# Altium PCB PCB1.PcbDoc
Units mil, origin at the board's own origin, x right, y up, seen from the top; angles counter-clockwise.
Board outline 1013.97 x 1387.98 mil, 2 copper layers (Top Layer, Bottom Layer); 17 components, 21 nets, 86 pads, 8 vias.
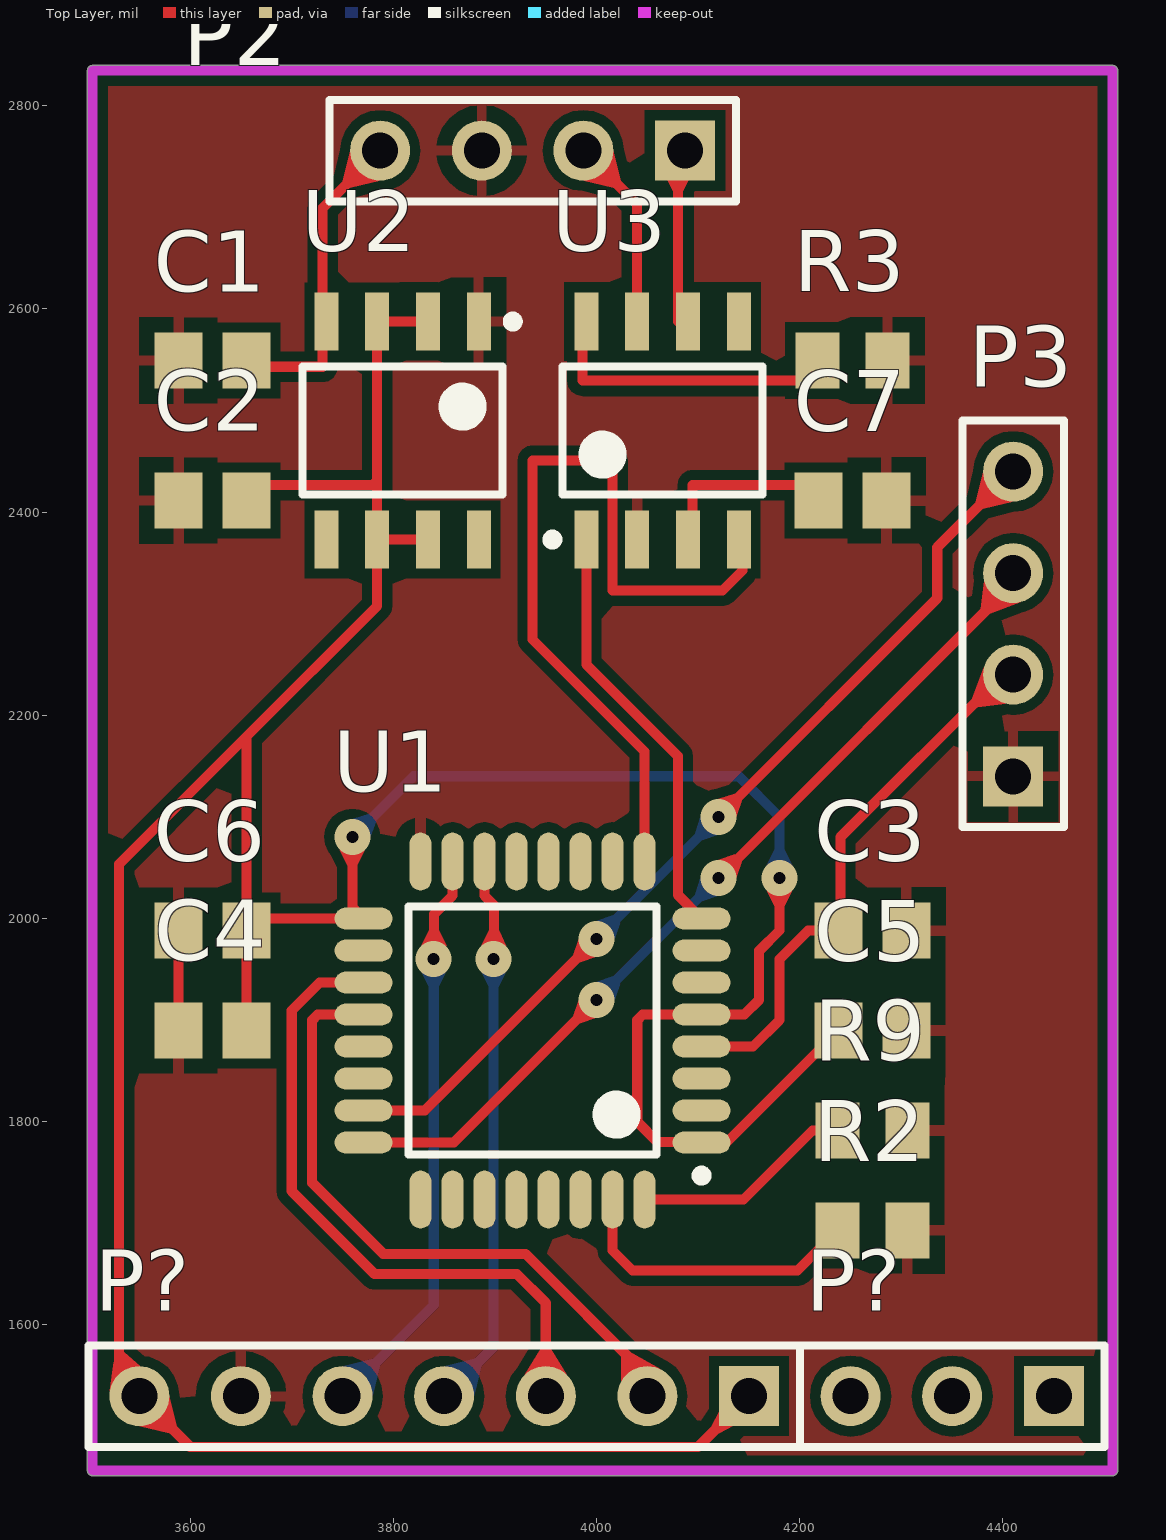
[diagram p0: Top Layer view]
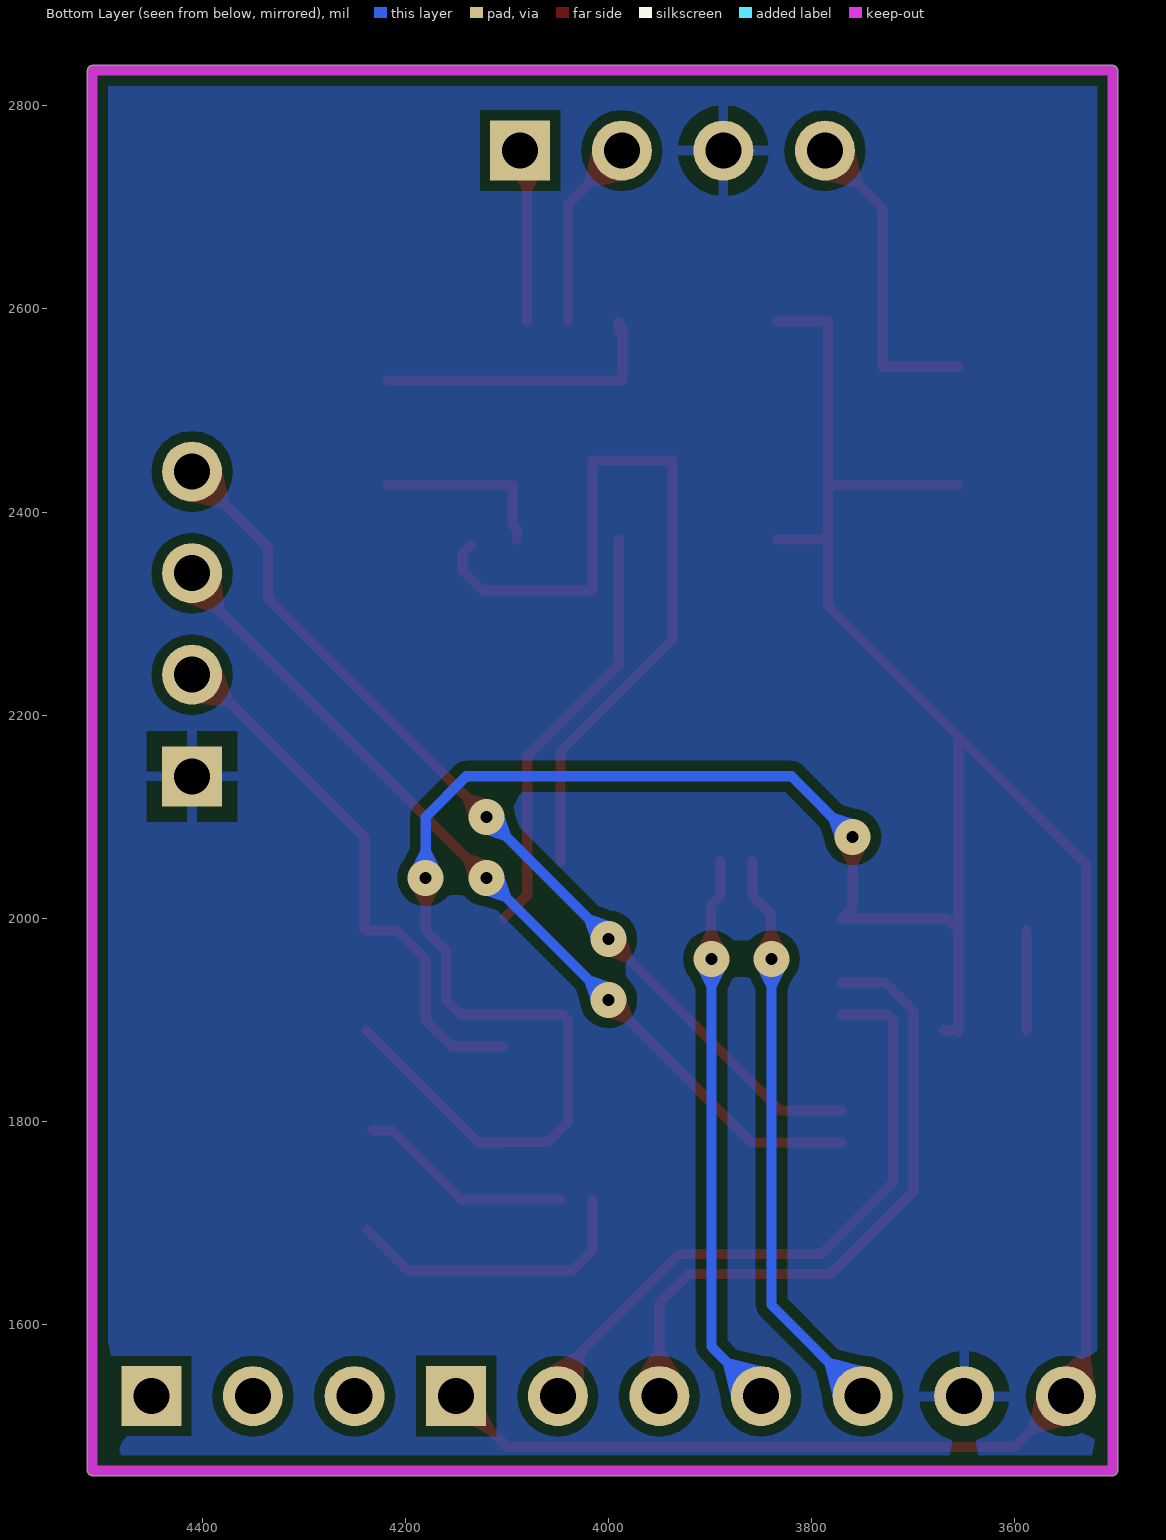
[diagram p1: Bottom Layer view, seen from below]
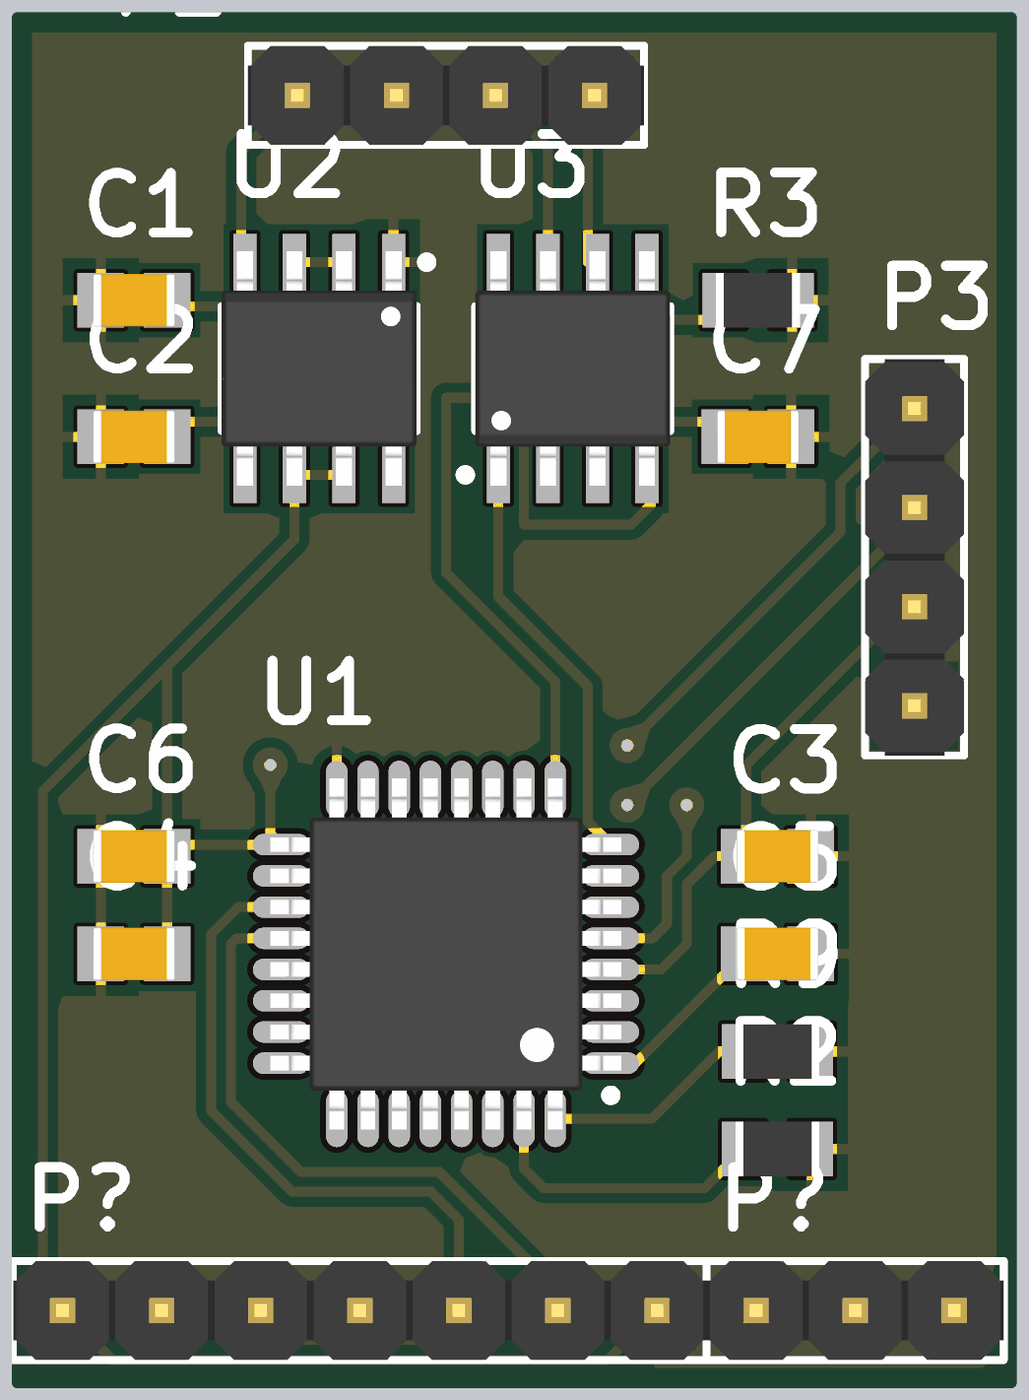
[diagram p2: 3D render of the assembled board from above, using the file's embedded part models]

## Layer stack, top to bottom
Top Solder: solder mask 0.4, Solder Resist, Dk 3.5
Top Layer: signal copper 1.4
Dielectric 1: dielectric 12.6, FR-4, Dk 4.8
Bottom Layer: signal copper 1.4
Bottom Solder: solder mask 0.4, Solder Resist, Dk 3.5

## Board outline
3498.92,1456.69 ccw(c3503.94,1456.69) 3503.94,1451.68 4507.87,1451.68 ccw(c4507.87,1456.69) 4512.89,1456.69 4512.89,2834.65 ccw(c4507.87,2834.65) 4507.87,2839.66 3503.94,2839.66 ccw(c3503.94,2834.65) 3498.92,2834.65

## Design rules (kind name [scope] priority, off if disabled: settings)
Clearance [All] p1: gap=10 except(7: Track-SMDPad; 8: SMDPad-SMDPad)
PlaneClearance [All] p1: clearance=25
PolygonConnect [All] p1: connectstyle=Relief reliefconductorwidth=10 reliefentries=4 polygonreliefangle="90 Angle" airgapwidth=15
RoutingVias [All] p1: holewidth=28 width=50 viastyle="Through Hole" minholewidth=28 minwidth=50 maxholewidth=28 maxwidth=50
SolderMaskExpansion [All] p1: expansion=4
Width [All] p1: maxlimit=10 minlimit=10 preferedwidth=10
29 further rules are at their usual default settings.

## Classes and differential pairs
component class Main: C1 C2 C3 C4 C5 C6 C7 P2 P3 P? R2 R3 R9 U1 U2 U3

## Components (designator, comment, footprint, x,y, rotation, side; value= is the part's Value field where it differs from the comment)
C1 "Cap" CAP_0805_IPC_MD 3622.05,2549.21 r0 top
C2 "Cap" CAP_0805_IPC_MD 3622.05,2411.42 r0 top
C3 "Cap" CAP_0805_IPC_MD 4271.65,1988.19 r180 top
C4 "Cap" CAP_0805_IPC_MD 3622.05,1889.76 r0 top
C5 "Cap" CAP_0805_IPC_MD 4271.65,1889.76 r180 top
C6 "Cap" CAP_0805_IPC_MD 3622.05,1988.19 r0 top
C7 "Cap" CAP_0805_IPC_MD 4251.97,2411.42 r180 top
P2 "CAN" HDR1X4 3937.01,2755.91 r180 top
P3 "SWD" HDR1X4 4410,2290 r90 top
P? "Header 7" HDR1X7 3850,1530 r180 top
P? "Header 3" HDR1X3 4350,1530 r180 top
R2 "Res" RES_0805_IPC_MD 4271.65,1692.91 r180 top
R3 "Res" RES_0805_IPC_MD 4251.97,2549.21 r180 top
R9 "Res" RES_0805_IPC_MD 4271.65,1791.34 r0 top
U1 "STM32F042K6T6" LQFP32_IPS_MD 3937.01,1889.76 r180 top
U2 "LD1117D33CTR" SOIC_8_IPC_MD 3809.06,2480.32 r270 top
U3 "SN65HVD230D" SOIC_8_IPC_MD 4064.96,2480.32 r90 top

## Footprints (in the part's own frame and the unit in brackets; to place one, negate y for a bottom-side part, rotate by r counter-clockwise, add the part's x,y. Pads: shape width x height; smd on the part's side, far side on the other; paste and mask are expansions set on the pad)
CAP_0805_IPC_MD [mm] "Chip Capacitor, 2-Leads, 0805, SAMSUNG, IPC Medium Density"
  rect 1.2x1.4 smd: 1(-0.85,0) 2(0.85,0)
  body extent -1.05,-0.67 1.05,0.67, height 1.35
HDR1X3 [mm] "Connector; Header; 3 Position"
  rect 1.5x1.5 hole 0.9: 1(-2.54,0)
  round 1.5 hole 0.9: 2(0,0) 3(2.54,0)
  silkscreen extent -3.81,-1.27 3.81,1.27, body extent -3.81,-1.27 3.81,1.27, height 8.6
HDR1X4 [mm] "Connector; Header; 4 Position"
  rect 1.5x1.5 hole 0.9: 1(-3.81,0)
  round 1.5 hole 0.9: 2(-1.27,0) 3(1.27,0) 4(3.81,0)
  silkscreen extent -5.08,-1.27 5.08,1.27, body extent -5.08,-1.27 5.08,1.27, height 8.6
HDR1X7 [mm]
  rect 1.5x1.5 hole 0.9: 1(-7.62,0)
  round 1.5 hole 0.9: 2(-5.08,0) 3(-2.54,0) 4(0,0) 5(2.54,0) 6(5.08,0) 7(7.62,0)
  silkscreen extent -8.89,-1.27 8.89,1.27, body extent -8.89,-1.27 8.89,1.27, height 8.6
LQFP32_IPS_MD [mm] "LQFP, 32-Leads, Body 7,00x7,00mm, Pitch 0,80mm, IPC Medium Density"
  oval 1.45x0.55 smd mask+0.15: 1(-4.225,2.8) 2(-4.225,2) 3(-4.225,1.2) 4(-4.225,0.4) 5(-4.225,-0.4) 6(-4.225,-1.2) 7(-4.225,-2) 8(-4.225,-2.8) 17(4.225,-2.8) 18(4.225,-2) 19(4.225,-1.2) 20(4.225,-0.4) 21(4.225,0.4) 22(4.225,1.2) 23(4.225,2) 24(4.225,2.8)
  oval 0.55x1.45 smd mask+0.15: 9(-2.8,-4.225) 10(-2,-4.225) 11(-1.2,-4.225) 12(-0.4,-4.225) 13(0.4,-4.225) 14(1.2,-4.225) 15(2,-4.225) 16(2.8,-4.225) 25(2.8,4.225) 26(2,4.225) 27(1.2,4.225) 28(0.4,4.225) 29(-0.4,4.225) 30(-1.2,4.225) 31(-2,4.225) 32(-2.8,4.225)
  silkscreen extent -4.35,-3.1 3.1,3.75, body extent -4.5,-4.5 4.5,4.5, height 1.6
RES_0805_IPC_MD [mm] "Chip Resistor, 2-Leads, 0805, Royal Ohm, IPC Medium Density"
  rect 1.1x1.4 smd: 1(-0.875,0) 2(0.875,0)
  body extent -1.07,-0.7 1.07,0.7, height 0.65
SOIC_8_IPC_MD [mm] "SOIC, 8-Leads, Pitch 1,27mm, IPC Medium Density"
  rect 1.45x0.6 smd: 1(-2.725,1.905) 2(-2.725,0.635) 3(-2.725,-0.635) 4(-2.725,-1.905) 5(2.725,-1.905) 6(2.725,-0.635) 7(2.725,0.635) 8(2.725,1.905)
  silkscreen extent -2.85,-2.5 1.6,2.88, body extent -3,-2.5 3,2.5, height 1.75

## Part data
C1 C2 C3 C4 C5 C6 C7: "Capacitor"
P2 P3: library part "Header 4", "Header, 4-Pin"
P?: "Header, 3-Pin"
R2 R3 R9: "Resistor"
U1: "ARM Cortex-M0 32-bit MCU, 32 KB Flash, 6 KB Internal RAM, 26 I/Os, 32-pin LQFP, -40 to 85 degC, Tray"
U2: "Fixed Low Drop Positive Voltage Regulator, 3.3V, 8-Pin SO, Tape and Reel"
U3: library part SN65HVD230DR, "3.3V CAN Transceiver with Standby Mode, 17 mA, -40 to 85 degC, 8-pin SOIC (D), Green (RoHS & no Sb/Br)"

## Via types
v1: diameter 35.43/35.43 (per signal layer), hole 11.81, Top Layer to Bottom Layer, tented both sides, 8 vias

## Nets (pads, with @x,y where several pads share a name; then routed paths per layer and width w, separated by ;. In a path a pad name is that pad's centre, name@x,y a point inside that pad or via, vN(x,y) a via of type N, cw(c..) or ccw(c..) an arc to the next point about the centre after c; other vN are vias at no path point)
12V: C1.2 P2.4 U2.4 | length 311.1
  Top Layer w10: C1.2@3655.51,2543.11 3730.32,2543.11 3730.32,2699.21 P2.4
+3V3: C7.2 U3.3 | length 179.4
  Top Layer w10: U3.3 4089.96,2382.87 4094.49,2387.4 4094.49,2426.57 C7.2@4218.5,2426.57
AUX_SCL: P?.2@4350,1530
AUX_SDA: P?.1@4450,1530
CAN_RX: U1.9 U3.4 | length 812.3
  Top Layer w10: U1.9 4047.24,2164.47 3937.01,2274.71 3937.01,2450.79 4015.75,2450.79 4015.75,2322.83 4124.02,2322.83 4143.7,2342.52 4143.7,2359.45 U3.4@4135.04,2368.11
CAN_TX: U1.8 U3.1 | length 420
  Top Layer w10: U3.1 3989.96,2250.04 4080,2160 4080,2023.35 U1.8
CANH: P2.2 U3.7 | length 190.2
  Top Layer w10: P2.2 4039.96,2702.95 4039.96,2597.44 U3.7
CANL: P2.1 U3.6 | length 171.2
  Top Layer w10: U3.6@4080.12,2587.6 4080.12,2749.02 P2.1
CLK_IN: P?.3@4250,1530
FSYNC: P?.4 U1.14 | length 550.4
  Top Layer w10: U1.14 3889.76,2022.56 3899.02,2013.31 v1@3899.02,1960
  Bottom Layer w10: P?.4 3898.69,1578.69 v1(3898.69,1960.34)
GND: C1.1 C2.1 C3.1 C4.1 C5.1 C6.1 C7.1 P2.3 P3.1 P?.6 R2.1 R3.1 R9.2 U1.16 U2.1 U3.2 | length 98.4
  Top Layer w10: C4.1 C6.1
INT: P?.5 U1.15 | length 571.1
  Top Layer w10: v1@3840,1960 3840,2004.29 3858.27,2022.56 U1.15
  Bottom Layer w10: P?.5 3839.67,1619.67 v1(3839.67,1960.34)
NetR2_2: R2.2 U1.31 | length 296.1
  Top Layer w10: U1.31 4015.75,1673.23 4035.43,1653.54 4197.83,1653.54 R2.2
NetR3_2: R3.2 U3.8 | length 298.4
  Top Layer w10: U3.8 3989.96,2577.76 3986.22,2581.5 3986.22,2529.53 R3.2@4217.52,2529.53
NetR9_1: R9.1 U1.32 | length 213.2
  Top Layer w10: U1.32 4144.69,1723.43 4212.6,1791.34 R9.1@4232.28,1791.34
NRST: C3.2 P3.2 U1.4 | length 546.1
  Top Layer w10: U1.4 4154.02,1874.02 4180,1900 4180,1960 4208.19,1988.19 C3.2 4240,1990 4240,2080 4400,2240 P3.2
SCL: P?.3@3950,1530 U1.19 | length 647.2
  Top Layer w10: U1.19 3727.46,1937.01 3700,1909.54 3700,1731.72 3781.72,1650 3921.72,1650 3950,1621.72 P?.3@3950,1530
SDA: P?.2@4050,1530 U1.20 | length 621.6
  Top Layer w10: U1.20 3725.63,1905.51 3720,1899.88 3720,1740 3790,1670 3930,1670 P?.2@4050,1550
SWCLK: P3.3 U1.24 | length 891
  Top Layer w10: U1.24 3859.53,1779.53 v1(4000,1920) ; v1(4120,2040) 4410,2330 P3.3 P3.3@4419.65,2330.35
  Bottom Layer w10: v1(4000,1920) v1(4120,2040)
SWDIO: P3.4 U1.23 | length 929.2
  Top Layer w10: U1.23 3831.02,1811.02 v1(4000,1980) ; v1(4120,2100) 4335.35,2315.35 4335.35,2365.35 4400,2430 P3.4
  Bottom Layer w10: v1(4000,1980) v1(4120,2100)
VIO: C2.2 C4.2 C5.2 C6.2 P?.1@4150,1530 P?.7 U1.1 U1.5 U1.17 U2.2 U2.3 U2.6 U2.7 | length 3713.5
  Top Layer w10: P?.7@3530,1520 3530,2053.62 3655.51,2179.13 ; P?.7@3530,1550 P?.7 3600,1480 4100,1480 P?.1@4150,1530 ; C4.2@3655.51,1888.54 C4.2 ; C2.2@3655.51,2426.57 3779.53,2426.57 3784.06,2431.1 ; C4.2@3670.24,1889.76 C4.2 ; v1(3759.67,2080.34) 3759.67,2011 U1.17 3667.32,2000 C6.2 ; U2.7 U2.6 ; U2.2 U2.3 U2.6 ; v1(4180,2040) 4180,1988.28 4160,1968.28 4160,1920 4145.51,1905.51 U1.5 4045.51,1905.51 4040,1900 4040,1800 4060,1780 4102.87,1780 U1.1 4127.95,1779.53 C5.2 ; C4.2 C6.2 ; C6.2 3655.51,2179.13 ; 3655.51,2179.13 3784.06,2307.68 U2.6
  Bottom Layer w10: v1@3760,2080 3820,2140 4140,2140 4180,2100 v1(4180,2040)
pads on no net: U1.2 U1.3 U1.6 U1.7 U1.10 U1.11 U1.12 U1.13 U1.18 U1.21 U1.22 U1.25 U1.26 U1.27 U1.28 U1.29 U1.30 U2.5 U2.8 U3.5

## Polygon pours and split planes (outlines as drawn)
GND on Top Layer "Top Layer GND" (solid, remove dead copper, pour order 0): 3503.94,2829.65 4507.87,2829.65 4507.87,1456.69 3503.94,1456.69
GND on Bottom Layer "Bottom GND" (solid, remove dead copper, pour order 2): 3503.94,2829.65 4507.87,2829.65 4507.87,1456.69 3503.94,1456.69

## Keep-outs
Keep-Out Layer:
  lines w10: 3503.94,1456.69 3503.94,2834.65 4507.87,2834.65 4507.87,1456.69 3503.94,1456.69